# Altium PCB ChildPCBRocketV4.PcbDoc
Units mil, origin at the board's own origin, x right, y up, seen from the top; angles counter-clockwise.
Board outline 2990 x 1280 mil, 2 copper layers (Top Layer, Bottom Layer); 18 components, 16 nets, 91 pads, 0 vias.
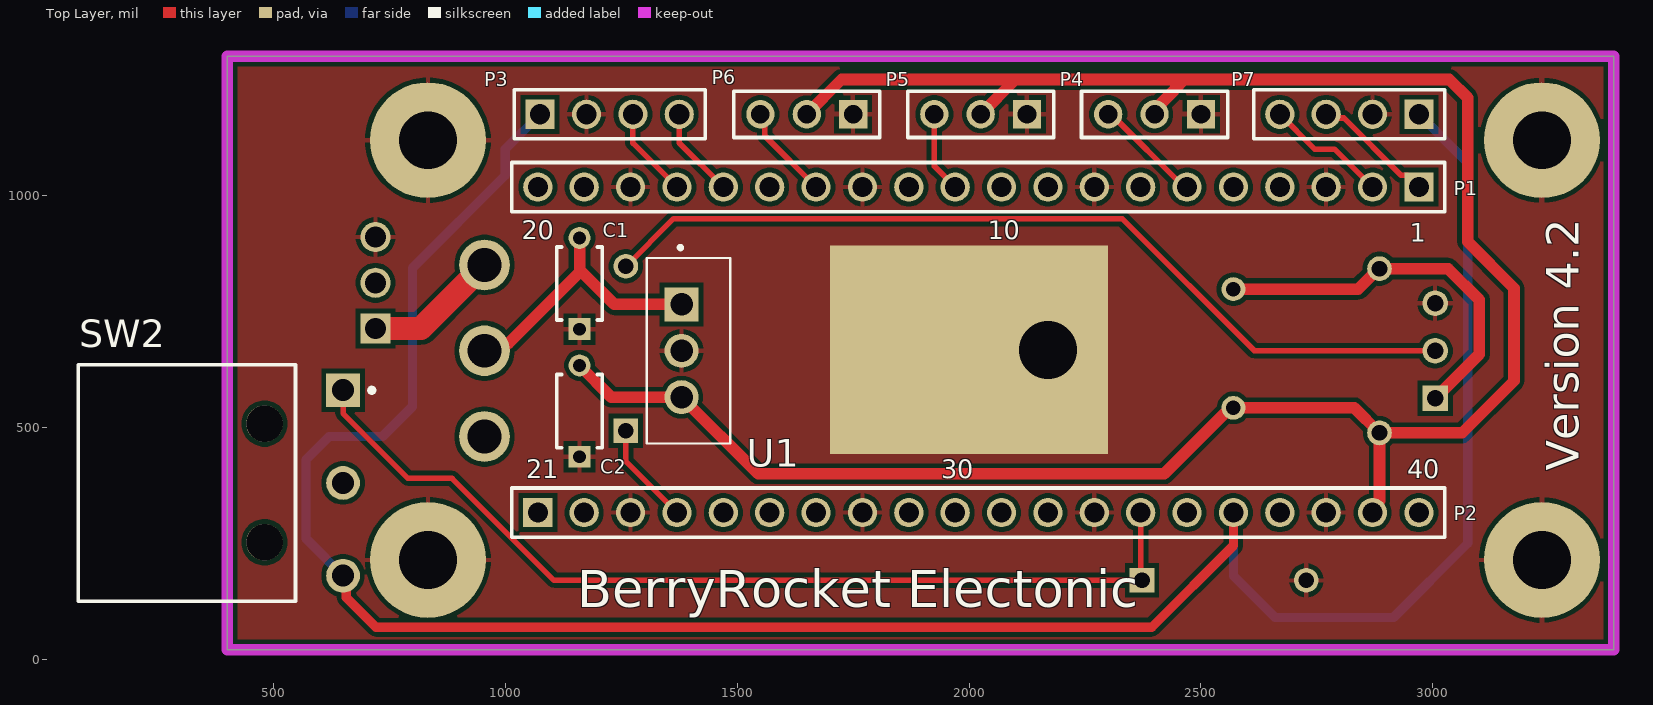
[diagram p0: Top Layer view]
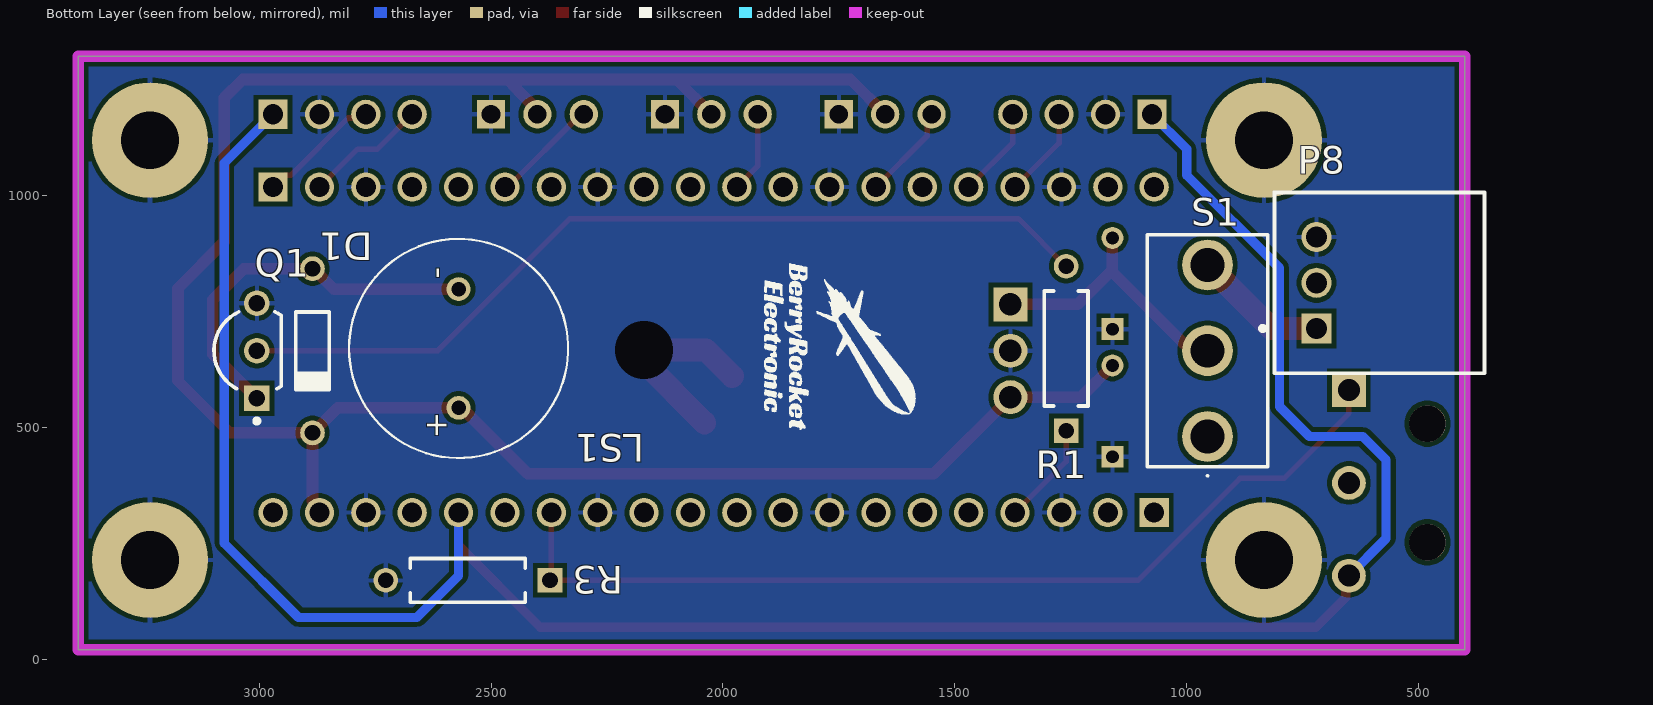
[diagram p1: Bottom Layer view, seen from below]
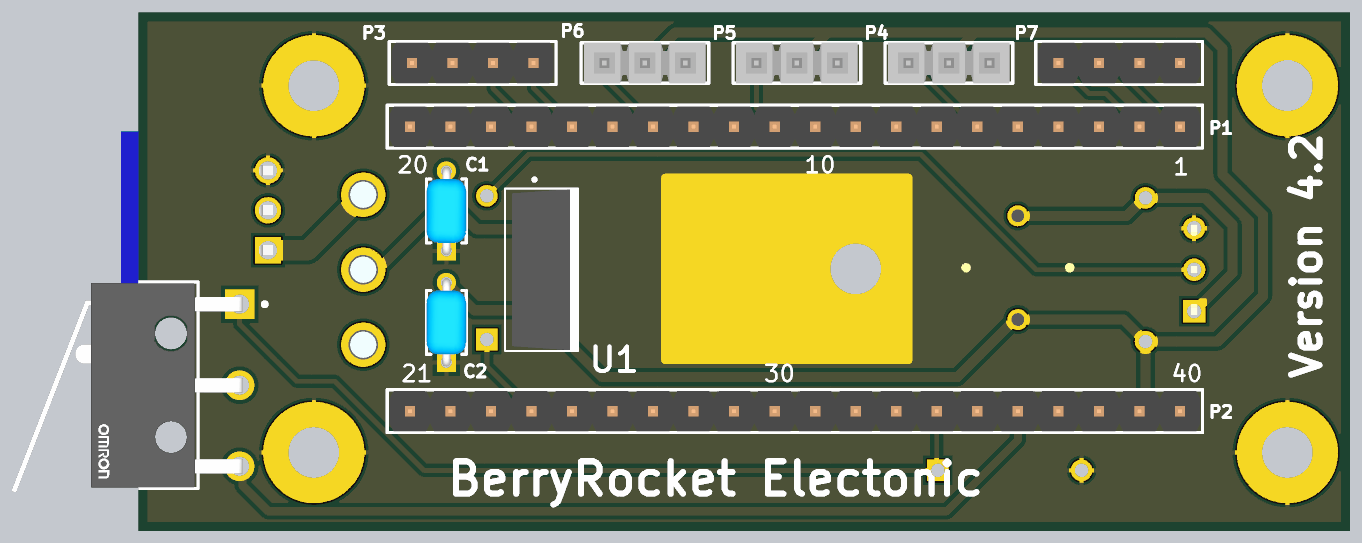
[diagram p2: 3D render of the assembled board from above, using the file's embedded part models]
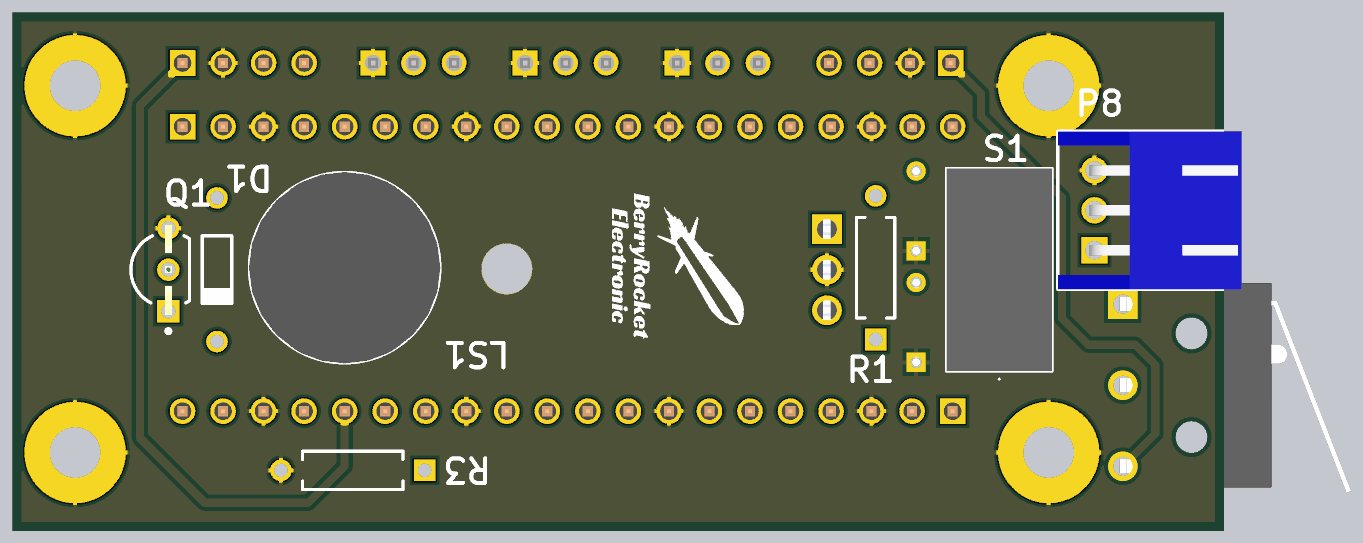
[diagram p3: 3D render of the assembled board from below, using the file's embedded part models]

## Layer stack, top to bottom
Top Solder: solder mask 0.4, Solder Resist, Dk 3.5
Top Layer: signal copper 1.4
Dielectric 1: dielectric 12.6, FR-4, Dk 4.8
Bottom Layer: signal copper 1.4
Bottom Solder: solder mask 0.4, Solder Resist, Dk 3.5

## Board outline
400,20 3390,20 3390,1300 400,1300

## Design rules (kind name [scope] priority, off if disabled: settings)
Clearance [All] p1: gap=10 ignorepadtopadclearanceinfootprint=FALSE except(0: Arc-Hole Track-Hole SMDPad-Hole THPad-Hole Via-Hole Fill-Hole Poly-Hole Region-Hole Text-Hole)
PolygonConnect PolygonConnect_POWER [All] p1: connectstyle=Relief reliefconductorwidth=10 reliefentries=4 polygonreliefangle="90 Angle" airgapwidth=10
PolygonConnect [All] p2: connectstyle=Relief reliefconductorwidth=10 reliefentries=4 polygonreliefangle="90 Angle" airgapwidth=10
RoutingVias [All] p1: holewidth=28 width=50 viastyle="Through Hole" minholewidth=28 minwidth=50 maxholewidth=28 maxwidth=50
SolderMaskExpansion [All] p1: expansion=4 istentingtop=FALSE
Width [All] p1: maxlimit=50 minlimit=10 preferedwidth=12
30 further rules are at their usual default settings.

## Components (designator, comment, footprint, x,y, rotation, side; value= is the part's Value field where it differs from the comment)
C1 "0.1uF" FP-RCE1K1-2_5-MFG 1160,810 r90 top
C2 "0.1uF" FP-RCE1K1-2_5-MFG 1160,535 r90 top
D1 "1N4148" NXP-SOD27-2_V 2885,665 r270 bottom locked
LS1 "CEM-1203" CUI_CEM-1203(42) 2570,670 r90 bottom
P1 "61302011121" 61302011121 2020,1018 r180 top locked
P2 "61302011121" 61302011121 2020,316 r0 top locked
P3 "61300411121" 61300411121 1225,1175 r0 top locked
P4 "TSW-103-07-L-S" SMTC-TSW-103-07-X-S 2500,1175 r180 top locked
P5 "TSW-103-07-L-S" SMTC-TSW-103-07-X-S 2125,1175 r180 top locked
P6 "TSW-103-07-L-S" SMTC-TSW-103-07-X-S 1750,1175 r180 top locked
P7 "61300411121" 61300411121 2820,1175 r180 top locked
P8 "S3B-XH-A(LF)(SN)" JST-S3B-XH-A(LF)(SN)_V 720,811.57 r90 bottom
Q1 "P2N2222ARL1G" ONSC-TO-92-3-29-11_AM_BL 3005.04,665 r90 bottom locked
R1 "MFR-25FBF52-100R" RESA60-630X240 1260,670 r90 bottom value=180R
R3 "MFR-25FBF52-100R" RESA60-630X240 2550,170 r0 bottom locked value=10K
S1 "SS12D10" SS12D10 955,480 r180 bottom locked
SW2 "D2F-01L-A1" FP-D2F-01L-A1-MFG 313.39,380 r270 top
U1 "LM340AT-5.0/NOPB" TO254P1054X470X1955-3 1380,665 r270 top

## Footprints (in the part's own frame and the unit in brackets; to place one, negate y for a bottom-side part, rotate by r counter-clockwise, add the part's x,y. Pads: shape width x height; smd on the part's side, far side on the other; paste and mask are expansions set on the pad)
61300411121 [mm] "Pin Header, pitch 2.54 mm, THT, Vertical, single row, 4p"
  rect 1.6x1.6 hole 1.1: 1(-3.81,0)
  round 1.6 hole 1.1: 2(-1.27,0) 3(1.27,0) 4(3.81,0)
  silkscreen extent -5.23,-1.35 5.23,1.35, body extent -5.08,-1.27 5.08,1.27, height 8.57
61302011121 [mm] "Pin Header, pitch 2.54 mm, THT, Vertical, single row, 20p"
  rect 1.6x1.6 hole 1.1: 1(-24.13,0)
  round 1.6 hole 1.1: 2(-21.59,0) 3(-19.05,0) 4(-16.51,0) 5(-13.97,0) 6(-11.43,0) 7(-8.89,0) 8(-6.35,0) 9(-3.81,0) 10(-1.27,0) 11(1.27,0) 12(3.81,0) 13(6.35,0) 14(8.89,0) 15(11.43,0) 16(13.97,0) 17(16.51,0) 18(19.05,0) 19(21.59,0) 20(24.13,0)
  silkscreen extent -25.55,-1.35 25.55,1.35, body extent -25.4,-1.27 25.4,1.27, height 8.57
CUI_CEM-1203(42) [mm]
  round 1.308 hole 0.8: N(3.25,0) P(-3.25,0)
  silkscreen extent -6,-6 6,6, body extent -6,-6 6,6, height 8.5
FP-D2F-01L-A1-MFG [mm]
  rect 1.85x1.85 hole 1.2 paste-1000 mask+0: 1(-5.08,8.55)
  round 1.85 hole 1.2 paste-1000 mask+0: 2(0,8.55) 3(5.08,8.55)
  round 2 hole 2 unplated paste-1000 mask+0: ""(-3.25,4.25) ""(3.25,4.25)
  silkscreen extent -6.48,-5.95 6.48,10.25, body extent -6.58,-6.05 8.05,9.57, height 0.25
FP-RCE1K1-2_5-MFG [mm]
  rect 1.2x1.2 hole 0.7 paste-1000 mask+0: 1(-2.5,0)
  round 1.2 hole 0.7 paste-1000 mask+0: 2(2.5,0)
  silkscreen extent -2,-1.25 2,1.25, body extent -3.2,-1.35 3.2,1.35, height 0.25
JST-S3B-XH-A(LF)(SN)_V [mm] "Header, 3-Leads, Body 9.9x11.5mm, Pitch 2.5mm"
  rect 1.65x1.65 hole 1.15: 1(-2.5,0)
  round 1.65 hole 1.15: 2(0,0) 3(2.5,0)
  silkscreen extent -4.95,-9.2 4.95,3.08, body extent -4.95,-9.2 4.95,2.3, height 6.15
NXP-SOD27-2_V [mm] "SOD27, 2-Leads, Dia 1.85mm, Body Length 4.25mm, Pin Spacing 9mm"
  round 1.35 hole 0.85: 1(-4.5,0) 2(4.5,0)
  silkscreen extent -2.12,-0.93 2.12,0.92, body extent -4.78,-0.93 4.78,0.92, height 1.85
ONSC-TO-92-3-29-11_AM_BL [mm] "TO, 3-Leads, Body Dia 4.7mm, Pitch 2.6mm"
  rect 1.4x1.4 hole 0.9: 1(-2.6,0)
  round 1.4 hole 0.9: 2(0,0) 3(2.6,0)
  silkscreen extent -3.97,-1.34 2.13,2.35, body extent -2.84,-1.34 2.84,2.35, height 5.33
RESA60-630X240 [mm] "Axial Resistor, 2-Leads, Dia 2.4mm, Body Length 6.3mm"
  rect 1.35x1.35 hole 0.85: 1(-4.5,0)
  round 1.35 hole 0.85: 2(4.5,0)
  silkscreen extent -3.15,-1.2 3.15,1.2, body extent -4.78,-1.2 4.78,1.2, height 2.4
SMTC-TSW-103-07-X-S [mm] ".025 SQ Post Terminal Strip Assembly, 1x3 Pins, Vertical, 2.54mm Pitch, Male"
  rect 1.55x1.55 hole 1.02: 1(0,0)
  round 1.55 hole 1.02: 2(2.54,0) 3(5.08,0)
  silkscreen extent -1.46,-1.27 6.54,1.27, body extent -1.27,-1.27 6.35,1.27, height 8.38
SS12D10 [mm]
  round 2.775 hole 1.85: 1(0,0) 2(0,4.7) 3(0,9.4)
  silkscreen extent -3.3,-2.2 3.3,11.05, body extent -3.3,-1.65 3.3,11.05, height 10.01
TO254P1054X470X1955-3 [mm]
  rect 1.86x1.86 hole 1.24: 1(-2.54,0)
  round 1.86 hole 1.24: 2(0,0) 3(2.54,0)
  silkscreen extent -5.75,-1.91 5.08,2.67, body extent -5.08,-1.49 5.08,2.71, height 22.86

## Part data
C1 C2: library part CMP-06035-036150-1, "Cap Ceramic Monolithic 220nF 50V 10% Thru-Hole Bulk", Capacitance=220nF, Case/Package=Radial, Dielectric=X7R, Max Operating Temperature=125°C, Min Operating Temperature=-55°C, Package Quantity=1, Ratings=AEC-Q200, Resistor Type=Ceramic, Tolerance=10%, Voltage Rating=50V, Height=3.5mm, Height - Seated (Max)=0.138inch, Lead Diameter=0.5mm, Lead Pitch=0.197inch, Lead/Base Style="Formed Leads", Length=0.157inch, Mount="Through Hole", Packaging="Tape and Reel", Termination=Radial, Voltage Rating (DC)=50V, Width=0.098inch
D1: library part CMP-0648-00002-1, "High-speed Diode, 100 V, 450 mA, 2-Pin SOD27, RoHS", Manufacturer="NXP Semiconductors", Cd="4 pF Max.", ComponentLink1Description="Manufacturer URL", ComponentLink1URL=http://www.nxp.com/, ComponentLink2Description=Datasheet, ComponentLink2URL=http://www.nxp.com/documents/data_sheet/1N4148_1N4448.pdf, ComponentLink3Description="Package Specification", ComponentLink3URL=http://www.nxp.com/documents/data_sheet/1N4148_1N4448.pdf, Configuration=Single, DatasheetVersion=Aug-04, IF="200 mA Max.", IFRM="450 mA", IFSM="4 A Max.", IR (VR="20 V)=25 nA", Mounting Technology="Through Hole", PackageDescription="2-Pin Hermetically Sealed Glass Package, Axial Leaded, Dia 1.85 mm, Body Length 4.25 mm, Lead Spread 25.4 mm", PackageReference=SOD27, PackageVersion=Aug-04, PartNumber=1N4148, RoHS=TRUE, Trr="4 ns Max.", VF (IF="10 mA)=1 V", VR="100 V Max."
LS1: library part CEM-1203(42), "12 mm, 3.5 V, 85 dB, Through Hole, Magnetic Audio Transducer Buzzer", Package=None, Availability=Unavailable, MF="{'manufacturer': u'CUI Devices'}", MP=CEM-1203(42), Price=None
P1 P2: library part CMP-1502-01102-1, "THT Vertical Pin Header WR-PHD, Pitch 2.54 mm, Single Row, 20 pins", Contact Resistance=20mOhm, Manufacturer="Wurth Elektronik", Operating Temperature=-40to105degC, Rated Current=3A, Withstanding Voltage=500VAC, Working Voltage=250VAC, Datasheet URL=https://katalog.we-online.de/em/datasheet/6130xx11121.pdf, Gender=Male, Manufacturer URL=http://www.we-online.de, Mounting Technology=THT, Orientation=Vertical, Package Reference=61302011121, Packaging=Bag, Part Number=61302011121, Pin Number=20, Pitch=2.54mm, Publisher=WurthElektronik, Row Number=Single
P3 P7: library part CMP-1502-01064-1, "THT Vertical Pin Header WR-PHD, Pitch 2.54 mm, Single Row, 4 pins", Contact Resistance=20mOhm, Manufacturer="Wurth Elektronik", Operating Temperature=-40to105degC, Rated Current=3A, Withstanding Voltage=500VAC, Working Voltage=250VAC, Datasheet URL=https://katalog.we-online.de/em/datasheet/6130xx11121.pdf, Gender=Male, Manufacturer URL=http://www.we-online.de, Mounting Technology=THT, Orientation=Vertical, Package Reference=61300411121, Packaging=Bag, Part Number=61300411121, Pin Number=4, Pitch=2.54mm, Publisher=WurthElektronik, Row Number=Single
P4 P5 P6: library part CMP-1024-00334-1, "0.025\" SQ Post Header, Through-hole, Vertical, -55 to 125 degC, 2.54 mm Pitch, 3-Pin, Male, RoHS", Manufacturer=Samtec, Temperature Range="-55 to 125 degC", ComponentLink1Description="Manufacturer URL", ComponentLink1URL=http://www.samtec.com, ComponentLink2Description=Datasheet, ComponentLink2URL=http://www.samtec.com/documents/webfiles/pdf/TSW_TH.PDF, ComponentLink3Description="Package Specification", ComponentLink3URL=http://www.samtec.com/documents/webfiles/cpdf/TSW-XXX-XX-XXX-X-XX-XXX-MKT.pdf, DatasheetVersion=F-214, Mounting Technology=Through-hole, Orientation=Vertical, PackageDescription=".025[0.64] SQ. Post Terminal Strip Assembly", PackageReference=TSW-103-07-X-S, PackageVersion="DM, 8/1988", PartNumber=TSW-103-07-L-S, Pitch="2.54 mm", RoHS=True
P8: library part CMP-1755-00006-1, "Male Header, Pitch 2.5 mm, 1 x 3 Position, Height 6.1 mm, Tail Length 3.4 mm, -25 to 85 degC, RoHS, Bulk", Case\Package=DIP, Frequency="1.8 MHz", Max Operating Temperature="70 degC", Max Ouput Current="-10 mA", Max Power Dissipation="1 W", Max Supply Voltage="15 V", Min Operating Temperature="0 degC", Min Supply Voltage="1 V", Nominal Supply Current="170 uA", Package Quantity=50, Channels=1, ComponentLink1Description="Manufacturer URL", ComponentLink1URL=http://www.jst.com/home2.html, ComponentLink2Description=Datasheet, ComponentLink2URL=http://www.jst-mfg.com/product/pdf/eng/eXH.pdf, DatasheetVersion=May-16, Height="4.57 mm", Length="9.81 mm", Mount="Through Hole", PackageDescription="Male Header, Pitch 2.5 mm, 1 x 3 Position, Height 6.1 mm, Tail Length 3.4 mm", PackageReference=S3B-XH-A(LF)(SN), Packaging=Rail/Tube, Pins=8, Radiation Hardening=No, REACH SVHC="No SVHC", RoHSCompliant=true, Weight="0.015535 oz", Width="6.35 mm"
Q1: library part CMP-1048-01587-1, "Amplifier Transistor, NPN Silicon, 3-Pin TO-92, Pb-Free, Tape and Reel", Manufacturer="On Semiconductor", ComponentLink1Description="Manufacturer URL", ComponentLink1URL=http://www.onsemi.com/, ComponentLink2Description=Datasheet, ComponentLink2URL=http://www.onsemi.com/pub_link/Collateral/P2N2222A-D.PDF, ComponentLink3Description="Package Specification", ComponentLink3URL=http://www.onsemi.com/pub_link/Collateral/MAC97-D.PDF, DatasheetVersion="Rev. 7", fT Min (MHz)=300, IC Continuous (A)=0.6, Mounting Technology="Through Hole", PackageDescription="3-Pin Transistor Outline, Body 4.825 x 3.685 mm, Pitch 1.27 mm", PackageReference=TO-92-3-29-11_AM_BL, PackageVersion="Rev. AM", Packing="Tape and Reel", PartNumber=P2N2222ARL1G, Polarity=NPN, RoHS=TRUE
R1 R3: library part CMP-009-00046-4, "Axial Resistor, 100 Ohm, +/- 1%, 0.25 W, -55 to 155 degC, 2-Pin THD, RoHS, Bulk", Case/Package=Axial, Manufacturer=Yageo, Max Operating Temperature=155°C, Min Operating Temperature=-55°C, Package Description="2-Pin Axial Lead, Dia 2.4 mm, Body Length 6.3 mm", Package Quantity=200, Package Reference=MFR-25, Power=250mW, Tolerance=1%, Voltage Rating=250V, Composition=CarbonFilm, Datasheet URL=http://www.yageo.com/documents/recent/Yageo%20LR_MFR_2013.pdf, Datasheet Version=Apr-13, Manufacturer URL=http://www.yageo.com/, Mounting Technology=TH, Packaging=Bulk, RoHS Compliant=True
S1: "Switch", Manufacturer_Name=DAIER, Datasheet Link=https://www.chinadaier.com/slide-switch-spdt/, Height=9.91mm, Manufacturer_Part_Number=SS12D10
SW2: library part CMP-08833-000018-1, "SWITCH SNAP ACT SPDT 100MA 30V", Current Rating=100mA, Max Operating Temperature=65°C, Max Voltage Rating (DC)=30V, Min Operating Temperature=-25°C, Operating Force=0.78N, Operating Position=0.268inch, Package Quantity=450, Ratings=IP40, Contact Material=Gold, Differential Travel=0.02inch, Electrical Life=30000Cycles, Mechanical Life=1000000Cycles, Mount="Through Hole", Orientation="Right Angle", Overtravel=0.022inch, Packaging=Bulk, Radiation Hardening=No, RoHS Compliant=Yes, Series=D2F, Switch Function=On-Mom, Termination="PC Pin", Throw Configuration=SPDT, Voltage Rating (DC)=30V
U1: Package=None, Availability=Unavailable, MF="{'manufacturer': u'Texas Instruments'}", MP=LM340AT-5.0/NOPB, Price=None

## Free pads (board coordinates)
  round 250 hole 125: 11(833,1119) 12(833,214) 13(3235,1119) 14(3235,214)
  rect 600x450 / inner rect 600x450 / far side rect 0x0 hole 125 copper offset -170,0 paste+100 mask+10: 15(2170,667)

## Nets (pads, with @x,y where several pads share a name; then routed paths per layer and width w, separated by ;. In a path a pad name is that pad's centre, name@x,y a point inside that pad or via, vN(x,y) a via of type N, cw(c..) or ccw(c..) an arc to the next point about the centre after c; other vN are vias at no path point)
+3V3: P2.16 P3.1 P7.1 SW2.3 | length 5156.6
  Top Layer w20: SW2.3 656.96,173.04 656.96,133.04 721,69 2394,69 2570,245 P2.16
  Bottom Layer w20: SW2.3@653.91,176.09 570,260 570,430 620,480 735,480 800,545 800,843.33 1000,1043.33 1000,1100 P3.1 ; P2.16 2570,180 2660,90 2915,90 3075,250 3075,1070 P7.1
+5: C2.2 D1.2 LS1.P P2.19 P4.2 P5.2 P6.2 U1.3 | length 4749.6
  Top Layer w25: C2.2 1228.43,565 U1.3 1545,400 2420.78,400 2562.83,542.05 LS1.P 2830.79,542.05 D1.2 ; P6.2 1725,1250 2100,1250 ; P5.2 2100,1250 ; P4.2 2400,1184.75 2442.25,1227 2442.25,1227.6 2464.64,1250 ; P2.19 2870,326.28 2885,341.28 D1.2 ; 2100,1250 2464.64,1250 ; 2464.64,1250 3035.36,1250 3075,1210.36 3075,900 3175,800 3175,600 3062.83,487.83 D1.2
+9: C1.2 S1.2 U1.1 | length 600.3
  Top Layer w25: S1.2 971.12,681.16 1006.94,681.16 1162.89,837.11 1235,765 U1.1 ; 1160,834.22 C1.2
+VBAT: P8.1 S1.3 | length 307.8
  Top Layer w50: P8.1 818.07,713.15 S1.3 S1.3@938.97,850.08
GND: C1.1 C2.1 P1.3 P1.8 P1.13 P1.18 P2.3 P2.8 P2.13 P2.18 P3.2 P4.1 P5.1 P6.1 P7.2 P8.3 pad.11 pad.12 pad.13 pad.14 pad.15 Q1.3 R3.2 U1.2 | length 424.5
  Top Layer w50: pad.15@1980,610 2037,667 pad.15 2170,640 pad.15@2040,510
GPIO_ACC: P2.14 R3.1 SW2.1 | length 2069.1
  Top Layer w12: SW2.1 650,530 790,390 885,390 1105,170 R3.1 2370,172.83 P2.14
NetD1_1: D1.1 LS1.N Q1.1 | length 827.8
  Top Layer w25: LS1.N 2838.6,797.95 2882.81,842.17 D1.1 3032.83,842.17 3100,775 3100,657.6 Q1.1
NetQ1_2: Q1.2 R1.2 | length 1905.7
  Top Layer w12: R1.2 1362.83,950 2330,950 2615,665 Q1.2
PWM1: P2.4 R1.1 | length 222.4
  Top Layer w12: R1.1 1260,426 P2.4
PWM2: P1.6 P4.3 | length 235
  Top Layer w12: P4.3 2306.5,1175 2463.5,1018 P1.6
PWM3: P1.11 P5.3 | length 175.6
  Top Layer w12: P5.3 1925,1063 P1.11
PWM4: P1.14 P6.3 | length 206.7
  Top Layer w12: P6.3 1559.38,1165.62 1559.38,1128.62 P1.14
SCL: P1.17 P3.3 | length 196.4
  Top Layer w12: P3.3 1275,1113 P1.17
SDA: P1.16 P3.4 | length 196.4
  Top Layer w12: P3.4 1375,1113 P1.16
"UART RX": P1.2 P7.4 | length 265
  Top Layer w12: P7.4 2745,1100 2788,1100 P1.2
"UART TX": P1.1 P7.3 | length 265
  Top Layer w12: P7.3 2778,1167 2808,1167 2931.5,1043.5 2944.5,1043.5 P1.1
pads on no net: P1.4 P1.5 P1.7 P1.9 P1.10 P1.12 P1.15 P1.19 P1.20 P2.1 P2.2 P2.5 P2.6 P2.7 P2.9 P2.10 P2.11 P2.12 P2.15 P2.17 P2.20 P8.2 S1.1 SW2. SW2.2

## Polygon pours and split planes (outlines as drawn)
GND on Bottom Layer "GND_L02_P001" (solid, pour order 1): 400,1300 400,25 3390,25 3390,1300
GND on Top Layer "GND_L01_P000" (solid, pour order 0): 400,1305 3380,1305 3380,25 400,25

## Keep-outs
Keep-Out Layer:
  the board outline again, w25

## Silkscreen, mask and mechanical layers (free items; w line width, h text height)
Top Overlay:
  text "Version 4.2" at 3315,406.56 h70 r90
  text "BerryRocket Electonic" at 1155,111.66 h80
Bottom Overlay:
  drawing of 22 lines, arcs and shapes, not listed

## Text inside footprints (layer, text, board x,y; h text height)
LS1: Bottom Overlay "+" at 2595,475 h50.1 r270; Bottom Overlay "-" at 2595,820 h50.08 r270
P1: Top Overlay "20" at 1035,905 h40; Top Overlay "1" at 2950,900 h40; Top Overlay "10" at 2040,905 h40
P2: Top Overlay "40" at 2945,390 h40; Top Overlay "21" at 1045,390 h40; Top Overlay "30" at 1940,390 h40